# EAGLE board mini_shutter_driver_pcb (EAGLE 9.7.0)
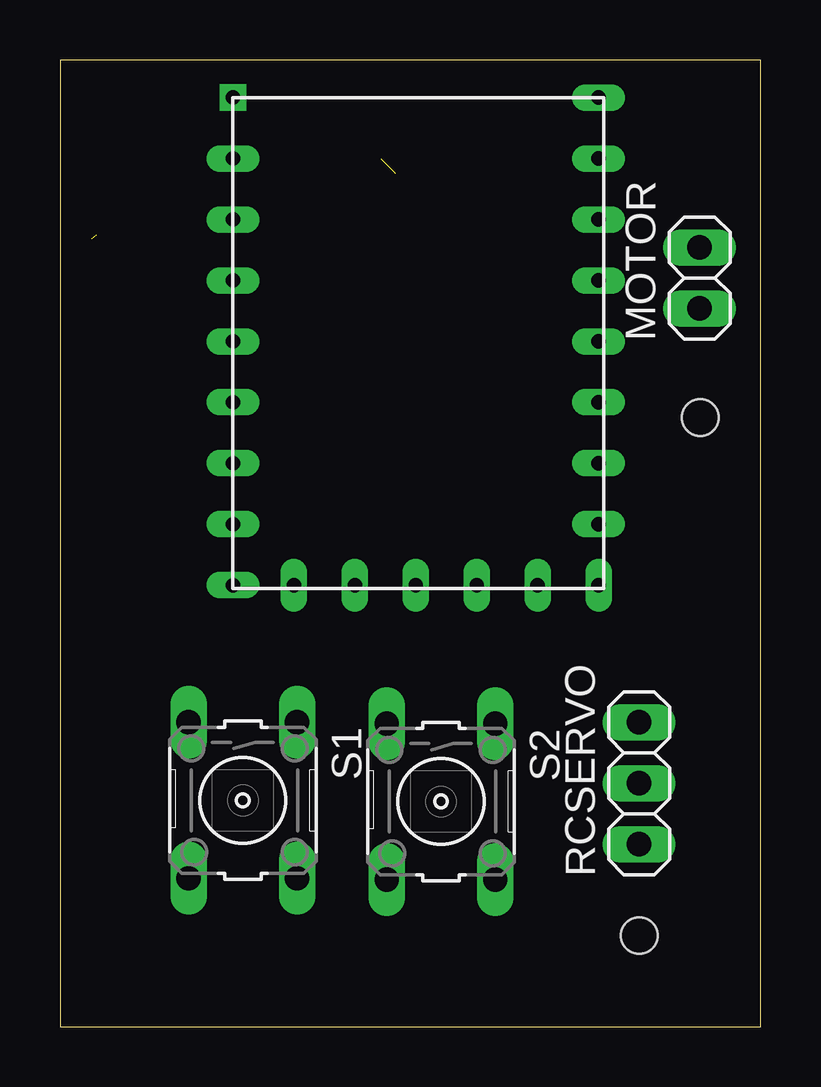
[diagram p0: board, top side]
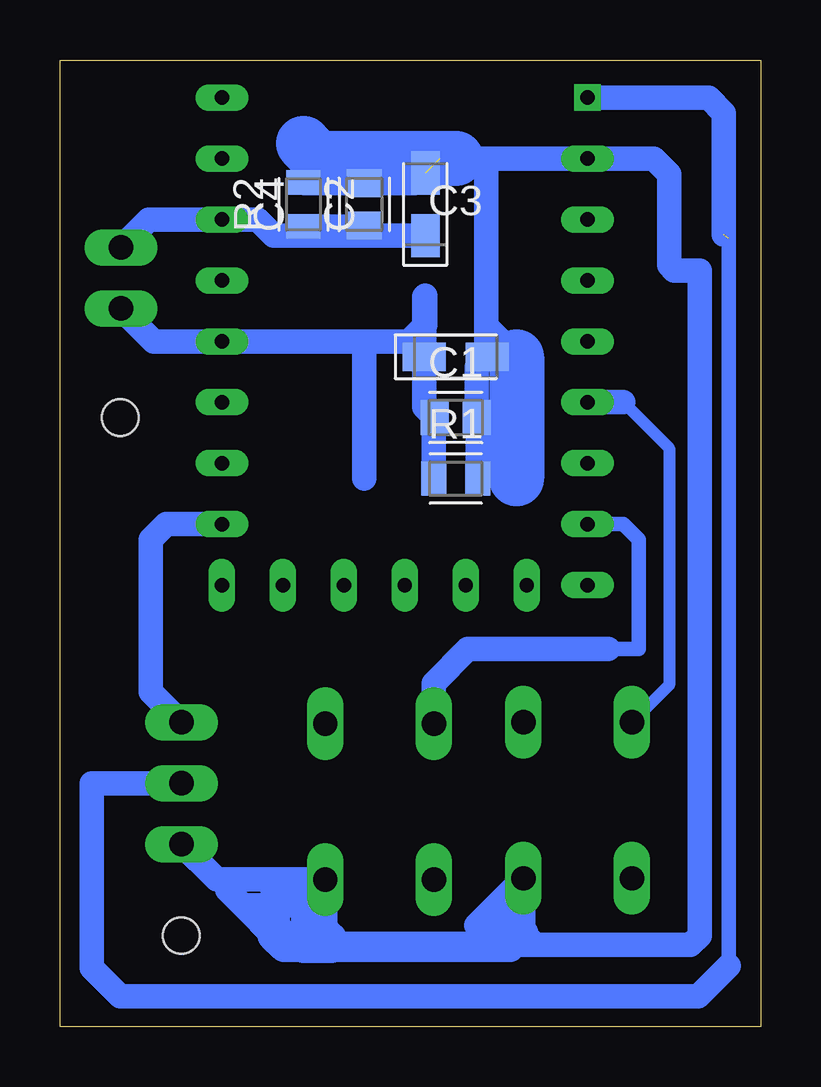
[diagram p1: board, bottom side, seen from below]

Size 29.19 x 40.31 mm. Coordinates in mm from the lower left corner, seen from the top.
Outline: 0,0 29.19,0 29.19,40.31 0,40.31 0,0
Copper layers (1*16): Top / Bottom
Stack-up Default Layer Stack: Top User Defined 0.035mm / Dielectric-1 User Defined 1.5mm / Bottom User Defined 0.035mm
Design rules "default": minimum track width 6mil, minimum drill 0.35mm, track to track 6mil, track to pad 6mil, pad to pad 6mil, via to via 6mil, smd to smd 6mil, copper to edge 40mil, drill to drill 6mil, minimum pad ring 10mil, minimum via ring 8mil, stop-mask expansion 4mil, vias tented up to drill 0mil, thermal gap 10mil
Holes 1.52 mm at 26.67,25.4 24.13,3.81

## Footprints (pad centres in the part's own frame; a part is rotated, then mirrored left to right if it is on the bottom)
CAPC2012X110 = smd 1.165 x 1.465: 1 -0.875,0; 2 0.875,0
CAPMP3216X180N = smd 1.796 x 1.189: 1 -1.31,0; 2 1.31,0
1X02 = drill 1.016 long: 1 -1.27,0; 2 1.27,0
RESC2012X65 = smd 1.031 x 1.42: 1 -0.919,0; 2 0.919,0
1X03 = drill 1.016 long: 1 -2.54,0; 2 0,0; 3 2.54,0
B3F-10XX = drill 1.016 long: 1 -3.251,2.261; 2 3.251,2.261; 3 -3.251,-2.261; 4 3.251,-2.261
RPI-ZERO-NANO-WAVESHARE = drill 0.6 square: 5V 0,0 | drill 0.6 long: GND 0,-2.54; P$3 0,-5.08; P$4 0,-7.62; P$5 0,-10.16; P$6 0,-12.7; P$7 0,-15.24; P$8 0,-17.78; P$9 0,-20.32; P$10 2.54,-20.32; P$11 5.08,-20.32; P$12 7.62,-20.32; P$13 10.16,-20.32; P$14 12.7,-20.32; P$15 15.24,-20.32; P$16 15.24,-17.78; P$17 15.24,-15.24; P$18 15.24,-12.7; P$19 15.24,-10.16; P$20 15.24,-7.62; P$21 15.24,-5.08; P$22 15.24,-2.54; P$23 15.24,0

## Placement (x,y rotation side)
C1  [CAPC2012X110]  12.7,25.4 0 bottom
C2  [CAPC2012X110]  16.51,34.29 90 bottom
C3  [CAPMP3216X180N]  12.7,27.94 0 bottom
C4  [CAPMP3216X180N]  13.97,34.29 90 bottom
MOTOR  PINHD-1X2  [1X02]  26.65,31.22 90 top
R1  [RESC2012X65]  12.7,22.86 0 bottom
R2  [RESC2012X65]  19.05,34.29 90 bottom
RCSERVO  PINHD-1X3  [1X03]  24.13,10.16 90 top
S1  [B3F-10XX]  7.62,9.45 270 top
S2  [B3F-10XX]  15.88,9.4 270 top
U$1  RPI-ZERO-NANORPI-ZERO-WAVESHARE  [RPI-ZERO-NANO-WAVESHARE]  7.2,38.74 0 top

## Library data of the parts
C1-C4 = Capacitor; CATEGORY: Capacitor
MOTOR RCSERVO = Connector; CATEGORY: CONNECTOR; SUB-CATEGORY: PIN-HEADER
R1 R2 = Tutorial - Fusion 360; CATEGORY: Resistor; SUB-CATEGORY: Fixed
S1 S2 = switch-omron; MPN: B3F-1000; OC_FARNELL: 176432; OC_NEWARK: 36M3542
U$1 = RPI-Zero

## Nets
5V: RCSERVO.2 U$1.5V
GND: C1.2 C2.2 C3.2 C4.2 R1.2 R2.2 RCSERVO.1 S1.2 S2.2 U$1.GND
GP2: C2.1 C4.1 MOTOR.2 R2.1 U$1.P$21
N$1: RCSERVO.3 U$1.P$16
N$2: S1.3 U$1.P$6
N$3: S2.3 U$1.P$8
N$6: C1.1 C3.1 MOTOR.1 R1.1 U$1.P$19

## Tracks (layer width: path | path; a pad name or v marks a point on that pad's centre or on a via)
5V  (1 unrouted)
  Bottom 0.61: 1.32,32.86 1.32,2.54
  Bottom 1.016: 1.32,2.54 2.59,1.27 26.67,1.27 27.87,2.47 27.87,10.16 RCSERVO.2 | U$1.5V 2.16,38.74 1.52,38.1 1.52,33.02
GND  (1 unrouted)
  Bottom 0.61: 22.23,5.71 RCSERVO.1
  Bottom 1.016: 11.43,36.2 U$1.GND 4.45,36.2 3.81,35.56 3.81,31.75 3.6,31.54 2.54,31.54 2.54,3.81 2.92,3.43 9.4,3.43 | 11.43,36.2 12.7,36.2 13.37,36.2 | 11.39,36.16 11.43,36.2 | C4.2 14.4,35.16 C2.2 19.01,35.16 R2.2 | R1.2 11.78,25.36 C1.2 11.82,27.51 C3.2 11.43,27.98 11.43,29.21 | 11.43,29.21 11.43,36.2 | RCSERVO.1 22.66,6.15 20.32,6.15 | 20.32,6.15 19.05,6.15 | S2.2 19.05,6.15 | 21.49,4.98 22.23,5.71 | 21.49,4.98 20.32,3.81 | 11.85,4.23 S1.2 9.88,3.91 | 9.88,3.53 9.88,3.91 | 9.88,3.91 9.4,3.43 | 9.4,3.43 10.54,3.43 10.16,3.81 10.16,5.08 11.43,3.81 | 17.87,3.17 19.05,3.17 20.12,4.24 20.12,5.08 | 20.32,3.81 19.05,3.81 | 19.05,3.81 18.49,3.81 | 18.49,3.81 18.14,4.17 | 17.78,3.81 18.14,4.17 | 18.14,4.17 S2.2 | S2.2 18.49,5.79 18.49,3.81 | 19.05,5.08 19.05,3.81 | 19.05,5.08 19.05,6.15 | 19.05,6.15 20.12,5.08 | 20.22,4.98 20.32,4.88 20.32,3.81 | 20.42,4.98 20.22,4.98 | 20.22,4.98 20.12,5.08 | 20.12,5.08 19.05,5.08 | 21.49,4.98 20.42,4.98 | 20.42,4.98 20.32,5.08 | 20.32,5.08 21.39,5.08 21.49,4.98 | 20.32,6.15 20.32,5.08 | 20.32,6.15 20.12,5.94 20.12,5.08 | 11.43,29.21 10.16,27.94
  Bottom 1.27: 9.88,3.91 10.45,3.34 19.85,3.34 20.32,3.81
  Bottom 2.286: 10.16,27.94 10.16,22.86 | 12.7,36.2 18.42,36.2 19.05,36.83
GP2
  Bottom 1.016: R2.1 16.55,33.37 C2.1 16.08,32.98 | 16.08,32.98 C4.1 | 16.08,32.98 20.28,32.98 20.96,33.66 U$1.P$21 25.48,33.66 MOTOR.2
N$1
  Bottom 1.016: U$1.P$16 24.76,20.96 25.4,20.32 25.4,13.97 RCSERVO.3
N$2
  Bottom 0.508: S1.3 3.81,14.25 3.81,24.13 5.72,26.04
  Bottom 1.016: U$1.P$6 5.72,26.04
N$3
  Bottom 0.61: U$1.P$8 5.72,20.96 5.08,20.32 5.08,15.75 6.35,15.75
  Bottom 1.016: S2.3 13.61,14.33 12.19,15.75 6.35,15.75
N$6
  Bottom 1.016: R1.1 13.62,25.36 C1.1 14.01,25.83 C3.1 14.01,30.44 13.97,30.48 13.97,29.26 14.65,28.58 16.51,28.58 | 16.51,28.58 U$1.P$19 25.28,28.58 MOTOR.1 | 16.51,28.58 16.51,22.86